# EAGLE board 19260 (EAGLE 7.6.0)
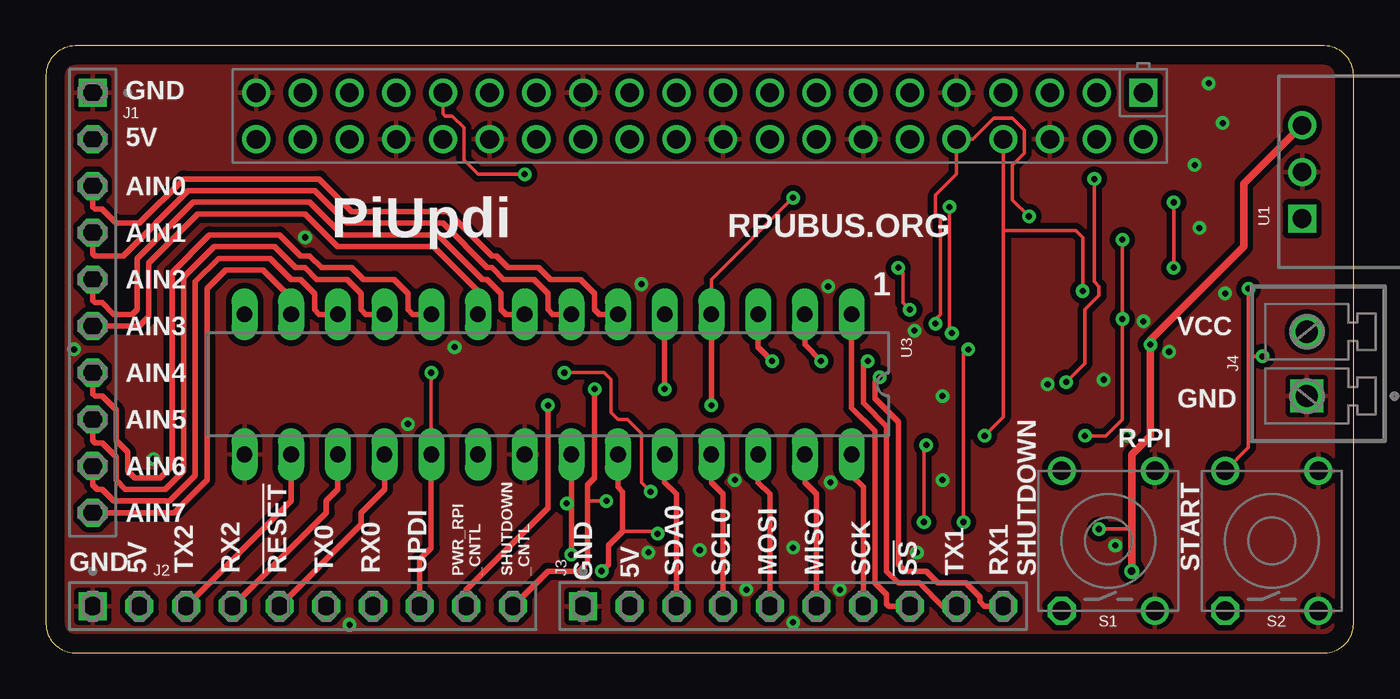
[diagram p0: board, top side]
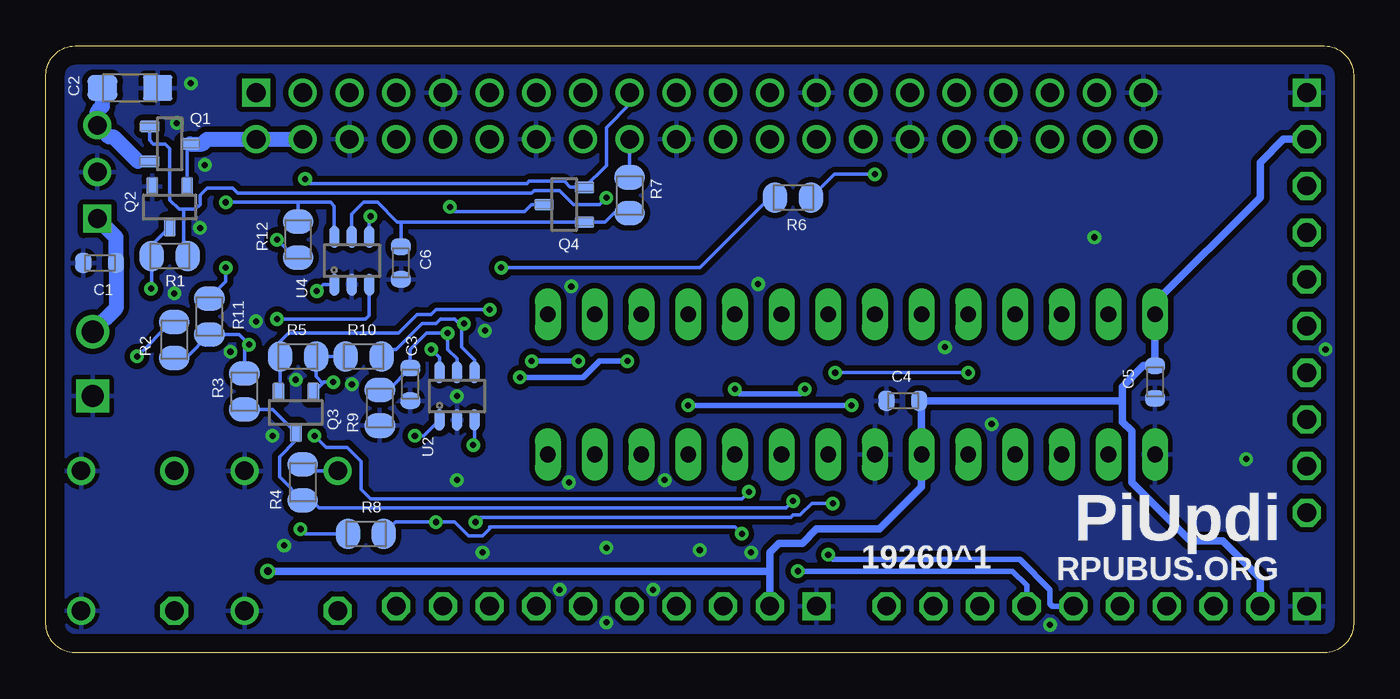
[diagram p1: board, bottom side, seen from below]

Size 71.12 x 33.02 mm. Coordinates in mm from the lower left corner, seen from the top.
Outline: 0,31.43 0,1.59 arc90 1.59,0 69.53,0 arc90 71.12,1.59 71.12,31.43 arc90 69.53,33.02 1.59,33.02 arc90 0,31.43
Copper layers (1*16): Top 0.034290625mm / dielectric 60mil / Bottom 0.034290625mm
Design rules "default *": minimum track width 8mil, minimum drill 13mil, track to track 8mil, track to pad 8mil, pad to pad 7mil, via to via 8mil, smd to smd 7mil, copper to edge 40mil, drill to drill 12mil, minimum pad ring 10mil, minimum via ring 8mil, stop-mask expansion 4mil, vias tented up to drill 17mil, thermal gap 10mil
Net classes: 0 default: width 0.178 mm, drill 0.33 mm

## Footprints (pad centres in the part's own frame; a part is rotated, then mirrored left to right if it is on the bottom)
C0603(1608) = smd 0.898 x 1.1: 1 -0.889,0; 2 0.889,0
3216 = smd 1.6 x 1.4: + -1.5,0; - 1.5,0
F1X10 = drill 1.016 square: 1 0,0 | drill 1.016 octagon: 2 2.54,0; 3 5.08,0; 4 7.62,0; 5 10.16,0; 6 12.7,0; 7 15.24,0; 8 17.78,0; 9 20.32,0; 10 22.86,0
MCV2 = drill 1.2 square: 1 0,0 | drill 1.2: 2 3.5,0
RASPI_ZERO_H40PIN = drill 1.016 square: 1 0,0 | drill 1.016: 2 0,2.54; 3 2.54,0; 4 2.54,2.54; 5 5.08,0; 6 5.08,2.54; 7 7.62,0; 8 7.62,2.54; 9 10.16,0; 10 10.16,2.54; 11 12.7,0; 12 12.7,2.54; 13 15.24,0; 14 15.24,2.54; 15 17.78,0; 16 17.78,2.54; 17 20.32,0; 18 20.32,2.54; 19 22.86,0; 20 22.86,2.54; 21 25.4,0; 22 25.4,2.54; 23 27.94,0; 24 27.94,2.54; 25 30.48,0; 26 30.48,2.54; 27 33.02,0; 28 33.02,2.54; 29 35.56,0; 30 35.56,2.54; 31 38.1,0; 32 38.1,2.54; 33 40.64,0; 34 40.64,2.54; 35 43.18,0; 36 43.18,2.54; 37 45.72,0; 38 45.72,2.54; 39 48.26,0; 40 48.26,2.54
SOT23 = smd 0.65 x 1.06: 1(G) -0.95,-1.1; 2(S) 0.95,-1.1; 3(D) 0,1.1
C0805(2012) = smd 1.321 x 1.651: 1 -0.977,0; 2 0.977,0
0M311 = drill 1.016 octagon: 1 -3.81,2.54 | drill 1.016: 2 3.81,2.54; 3 -3.81,-2.54; 4 3.81,-2.54
OKI-78SR-H = drill 1.016 square: 1 0,0 | drill 1.016: 2 -2.54,0; 3 -5.08,0
SOT23-6,SOT26 = smd 0.55 x 1.2: 1 -0.95,-1.3; 2 0,-1.3; 3 0.95,-1.3; 4 0.95,1.3; 5 0,1.3; 6 -0.95,1.3
DIL28-3 = drill 0.85 pad 1.422 long: 1 -16.51,-3.81; 2 -13.97,-3.81; 3 -11.43,-3.81; 4 -8.89,-3.81; 5 -6.35,-3.81; 6 -3.81,-3.81; 7 -1.27,-3.81; 8 1.27,-3.81; 9 3.81,-3.81; 10 6.35,-3.81; 11 8.89,-3.81; 12 11.43,-3.81; 13 13.97,-3.81; 14 16.51,-3.81; 15 16.51,3.81; 16 13.97,3.81; 17 11.43,3.81; 18 8.89,3.81; 19 6.35,3.81; 20 3.81,3.81; 21 1.27,3.81; 22 -1.27,3.81; 23 -3.81,3.81; 24 -6.35,3.81; 25 -8.89,3.81; 26 -11.43,3.81; 27 -13.97,3.81; 28 -16.51,3.81

## Placement (x,y rotation side)
C1  .1uF  [C0603(1608)]  68.2,21.21 180 bottom
C2  10uF  [3216]  66.55,30.73 0 bottom
C3  .1uF  [C0603(1608)]  51.31,14.61 270 bottom
C4  .1uF  [C0603(1608)]  24.51,13.72 180 bottom
C5  .1uF  [C0603(1608)]  10.79,14.73 270 bottom
C6  .1uF  [C0603(1608)]  51.82,21.21 270 bottom
J1  PPPC101LFBN  [F1X10]  2.54,30.48 270 top
J2  PPPC101LFBN  [F1X10]  2.54,2.54 0 top
J3  PPPC101LFBN  [F1X10]  29.21,2.54 0 top
J4  PST1,0/2-3,5  [MCV2]  68.58,13.97 90 top
J5  40 PIN HDR  [RASPI_ZERO_H40PIN]  59.69,30.48 180 top
Q1  DMB  [SOT23]  64.39,27.69 270 bottom
Q2  K38  [SOT23]  64.39,24.26 180 bottom
Q3  K38  [SOT23]  57.53,13.08 180 bottom
Q4  K84  [SOT23]  42.93,24.38 90 bottom
R1  1k  [C0805(2012)]  64.39,21.59 0 bottom
R2  10k  [C0805(2012)]  64.14,17.02 90 bottom
R3  100k  [C0805(2012)]  60.33,14.22 270 bottom
R4  1k  [C0805(2012)]  57.15,9.27 90 bottom
R5  10k  [C0805(2012)]  57.4,16.13 180 bottom
R6  182  [C0805(2012)]  30.48,24.77 0 bottom
R7  182  [C0805(2012)]  39.37,24.89 270 bottom
R8  3.01k  [C0805(2012)]  53.72,6.48 0 bottom
R9  10k  [C0805(2012)]  52.96,13.34 270 bottom
R10  1.82k  [C0805(2012)]  53.85,16.13 0 bottom
R11  3.01k  [C0805(2012)]  62.23,18.29 90 bottom
R12  3.01k  [C0805(2012)]  57.4,22.48 90 bottom
S1  KSA0M311  [0M311]  57.78,6.1 90 top
S2  KSA0M311  [0M311]  66.67,6.1 90 top
U1  I50115H  [OKI-78SR-H]  68.33,23.62 270 top
U2  Z4  [SOT23-6,SOT26]  48.77,13.97 0 bottom
U3  AVR128DA28-I/SP  [DIL28-3]  27.3,14.61 180 top
U4  Z4  [SOT23-6,SOT26]  54.48,21.34 0 bottom

## Library data of the parts
C1 C3-C6 = C-C
C2 = C-T
J1-J3 = J-HDR2.54mm
J4 = J-HDR3.5mm
J5 = U-Pi
Q1 Q4 = Q-PCH
Q2 Q3 = Q-NCH
R1-R12 = R-C
S1 S2 = S-Tactile
U1 = P-DCDC
U2 U4 = U-7400
U3 = U-AVR

## Nets
0V: C1.2 C2.- C3.2 C4.2 C5.2 C6.2 J1.1 J2.1 J3.1 J4.1 J5.6 J5.9 J5.14 J5.20 J5.25 J5.30 J5.34 J5.39 Q2.2(S) R9.2 S1.3 S1.4 S2.3 S2.4 U1.2 U2.2 U3.15 U3.21 U4.2
5V0@2: J5.2 J5.4 Q1.3(D) Q2.1(G)
!RESET: J2.5 U3.18
!SS: J3.8 U3.1
!UPDI_: C3.1 Q4.3(D) R9.1 U2.5
+3V3: J5.17 Q3.1(G) Q4.2(S) R5.1 R10.1
+5V: C2.+ C4.1 C5.1 J1.2 J2.2 J3.2 Q1.2(S) R2.1 R3.1 R8.1 R11.1 U1.3 U3.14 U3.20
AIN0: J1.3 U3.6
AIN1: J1.4 U3.7
AIN2: J1.5 U3.8
AIN3: J1.6 U3.9
AIN4: J1.7 U3.10
AIN5: J1.8 U3.11
AIN6: J1.9 U3.12
AIN7: J1.10 U3.13
MISO: J3.6 U3.27
MOSI: J3.5 U3.26
N$1: R4.2 S1.2
N$2: J5.18 R7.1
N$3: J5.31 R6.2
N$4: R11.2 R12.2 U4.6
N$6: Q2.3(D) R1.1 R2.2 S2.2
PWR_RPI_CNTL: J2.9 Q1.1(G) R1.2 U3.4
RX0: J2.7 R8.2 U2.6 U3.23
RX1: J3.10 U3.3
RX2: J2.4 U3.17
RX_: J5.10 R10.2 U2.4 U4.4
SCK: J3.7 U3.28
SCL0: J3.4 U3.25
SDA0: J3.3 U3.24
SHUTDOWN: Q3.2(S) R5.2 R6.1
SHUTDOWN_CNTL: J2.10 Q3.3(D) R3.2 R4.1 U3.5
TX0: J2.6 U2.3 U3.22
TX1: J3.9 U3.2
TX2: J2.3 U3.16
TX_: J5.8 U2.1 U4.1
UPDI: J2.8 R12.1 U3.19 U4.3
UPDI_: C6.1 Q4.1(G) R7.2 U4.5
VCC: C1.1 J4.2 U1.1

## Tracks (layer width: path | path; a pad name or v marks a point on that pad's centre or on a via)
0V  (via drill 0.33)
  other vias: 14.1,22.61 5.84,10.54 63.25,30.99 1.52,16.51 22.23,16.64 19.68,12.45 32.38,20.07 32.77,5.46 35.56,5.59 37.47,9.4 38.1,3.43 16.51,1.52 40.64,1.65 40.64,5.71 42.67,9.27 43.18,3.43 47.37,5.46 48.77,9.4 42.55,19.94 47.24,17.53 48.77,13.97 54.48,14.61 57.53,14.86 58.17,5.84 58.8,11.81 59.69,18.03 62.74,23.11 62.48,26.54 64.01,28.83 64.14,19.56 61.09,16.38
  pour Top (isolate 0.305): 71.12,0 0,0 0,33.02 71.12,33.02
  pour Bottom (isolate 0.305): 0,33.02 71.12,33.02 71.12,0 0,0
5V0@2
  Bottom 0.203: Q2.1(G) 63.44,27.54 Q1.3(D)
  Bottom 0.813: Q1.3(D) 62.61,27.69 62.36,27.94 J5.2 J5.4
!RESET
  Top 0.305: J2.5 17.14,6.99 17.14,7.62 18.41,8.89 U3.18
!SS
  Top 0.305: U3.1 43.81,13.34 45.09,12.06 45.09,3.81 45.72,3.17 45.72,2.67 45.85,2.54 J3.8
!UPDI_  (via drill 0.33)
  Top 0.203: v49.15,24.26 49.15,17.53 v49.28,17.4
  Bottom 0.203: 49.66,17.4 50.42,17.4 51.31,16.51 C3.1 52.49,14.31 R9.1 | 49.66,17.4 49.28,17.02 49.28,16.51 48.77,16 U2.5 | Q4.3(D) 44.7,24.38 45.09,24 48.9,24 v49.15,24.26 | v49.28,17.4 49.66,17.4
+3V3  (via drill 0.33)
  Top 0.203: v57.02,25.78 57.02,20.19 57.28,19.94 57.28,19.43 56.52,18.67 56.52,15.75 v55.5,14.73
  Bottom 0.203: J5.17 39.37,29.84 40.64,28.57 40.64,26.52 Q4.2(S) 42.61,25.33 42.93,25.65 44.83,25.65 44.96,25.53 56.77,25.53 v57.02,25.78 | 54.93,16.02 R10.1 R5.1 56.43,15.03 56.07,14.67 | v55.5,14.73 56.01,14.73 56.07,14.67 | Q3.1(G) 56.56,14.18 56.07,14.67
+5V  (via drill 0.33, 0.41)
  Top 0.203: v57.28,6.73 59.05,6.73
  Top 0.406: U1.3 65.15,25.53 65.15,22.1 60.07,17.02 v60.07,16.76 60.07,11.81 59.05,10.79 59.05,6.73 v59.05,4.45
  Bottom 0.203: R3.1 60.33,16.51 v60.07,16.76 | R2.1 63.5,16.04 R11.1 60.62,17.31 v60.07,16.76 | 59.94,16.89 v60.07,16.76 | R8.1 57.02,6.48 v57.28,6.73
  Bottom 0.406: Q1.2(S) 66.11,26.74 | J1.2 3.81,27.94 5.08,26.67 5.08,24.77 10.79,19.05 U3.14 C5.1 11.43,15.62 12.57,14.48 12.57,13.72 | 12.57,13.72 12.57,12.57 12.06,12.06 12.06,9.27 8.89,6.1 7.11,6.1 5.08,4.06 J2.2 | J3.2 31.75,4.57 | 31.75,4.57 31.75,5.46 31.24,5.97 29.97,5.97 29.21,6.73 25.78,6.73 23.5,9.02 U3.20 23.5,13.59 C4.1 12.57,13.72 | v59.05,4.45 31.88,4.45 31.75,4.57
  Bottom 0.813: 66.11,26.74 67.44,28.07 67.69,28.07 U1.3 68.33,29.46 68.05,29.74 C2.+
AIN0
  Top 0.305: J1.3 2.54,24.26 2.67,24.13 3.05,24.13 3.81,23.37 5.08,23.37 7.49,25.78 14.86,25.78 16.64,24 21.84,24 24.26,21.59 24.51,21.59 25.15,20.95 26.8,20.95 27.43,20.32 29.08,20.32 29.84,19.56 29.84,18.67 30.1,18.41 U3.6
AIN1
  Top 0.305: J1.4 2.54,21.72 2.67,21.59 4.19,21.59 7.75,25.15 14.61,25.15 16.38,23.37 21.59,23.37 24,20.95 24.26,20.95 24.89,20.32 26.54,20.32 27.3,19.56 27.3,18.67 27.56,18.41 U3.7
AIN2
  Top 0.305: J1.5 2.54,19.18 2.67,19.05 3.05,19.05 3.68,18.41 4.7,18.41 4.95,18.67 4.95,21.46 8,24.51 14.35,24.51 16.13,22.73 21.34,22.73 23.75,20.32 24,20.32 24.77,19.56 24.77,18.67 25.02,18.41 U3.8
AIN3
  Top 0.305: J1.6 5.08,17.78 5.59,18.29 5.59,21.21 8.26,23.88 14.1,23.88 15.88,22.1 21.08,22.1 23.5,19.68 U3.9
AIN4
  Top 0.305: J1.7 2.54,14.1 2.67,13.97 3.05,13.97 3.81,13.21 3.81,11.56 4.45,10.92 4.45,9.91 4.83,9.53 6.22,9.53 6.86,10.16 6.86,20.7 8.89,22.73 12.7,22.73 13.84,21.59 14.35,21.59 14.99,20.95 16.64,20.95 17.27,20.32 18.92,20.32 19.68,19.56 19.68,18.67 19.94,18.41 U3.10
AIN5
  Top 0.305: J1.8 2.54,11.56 2.67,11.43 3.05,11.43 3.81,10.67 3.81,9.4 4.32,8.89 6.48,8.89 7.49,9.91 7.49,20.45 9.14,22.1 12.45,22.1 13.59,20.95 14.1,20.95 14.73,20.32 16.38,20.32 17.14,19.56 17.14,18.67 17.4,18.41 U3.11
AIN6
  Top 0.305: J1.9 2.54,9.14 2.79,8.89 3.05,8.89 3.68,8.26 6.73,8.26 8.13,9.65 8.13,20.19 9.4,21.46 12.19,21.46 13.34,20.32 13.84,20.32 14.61,19.56 14.61,18.67 14.86,18.41 U3.12
AIN7
  Top 0.305: J1.10 6.99,7.62 8.76,9.4 8.76,19.81 9.78,20.83 11.81,20.83 13.34,19.3 U3.13
MISO
  Top 0.305: U3.27 41.27,9.27 41.91,8.64 J3.6
MOSI
  Top 0.305: U3.26 38.73,9.27 39.37,8.64 J3.5
N$1
  Bottom 0.203: R4.2 56.81,9.91 S1.2
N$2
  Bottom 0.203: J5.18 R7.1
N$3  (via drill 0.33)
  Top 0.203: v26.04,26.04 23.5,26.04 22.73,26.8 22.73,28.57 22.1,29.21 21.72,29.21 21.59,29.34 J5.31
  Bottom 0.203: R6.2 28.23,26.04 v26.04,26.04
N$4  (via drill 0.33)
  Top 0.203: v61.34,24.51 v61.34,20.95
  Bottom 0.203: U4.6 55.43,24.32 55.63,24.51 57.4,24.51 | 57.4,24.51 v61.34,24.51 | v61.34,20.95 61.34,20.19 61.85,19.68 61.85,19.52 R11.2 | R12.2 57.4,24.51
N$6  (via drill 0.33)
  Top 0.203: v65.41,19.81 65.41,16.13 | 65.41,16.13 65.41,11.18 S2.2 | v66.17,16.13 65.41,16.13
  Bottom 0.203: Q2.3(D) 65.37,22.18 R1.1 65.37,19.85 v65.41,19.81 | R2.2 64.3,18 v66.17,16.13
PWR_RPI_CNTL  (via drill 0.33)
  Top 0.203: v40.64,24.77 36.2,20.32 U3.4
  Top 0.305: J2.9 22.86,3.43 27.3,7.87 v27.3,13.46 | v36.2,13.46 U3.4
  Bottom 0.203: Q1.1(G) 65.49,27.9 65.28,27.69 64.64,27.69 64.39,27.43 64.39,24.64 63.88,24.13 63.63,24.13 | 63.63,24.13 63.63,21.8 R1.2 | 63.63,24.13 62.99,24.13 62.74,24.38 62.74,24.89 62.36,25.27 60.96,25.27 60.71,25.02 44.7,25.02 44.58,25.15 43.18,25.15 42.42,24.38 41.02,24.38 v40.64,24.77
  Bottom 0.305: v27.3,13.46 v36.2,13.46
RX0  (via drill 0.33)
  Top 0.203: v33.27,6.48 33.15,6.6 31.37,6.6 | v49.91,7.11 49.91,16.26 v50.16,16.51
  Top 0.305: U3.23 31.11,9.02 31.37,8.76 31.37,6.6 30.61,5.84 30.61,4.83 v30.23,4.45
  Bottom 0.203: v33.27,6.48 33.66,6.86 46.99,6.86 46.99,6.73 47.37,6.35 48.13,6.35 48.9,7.11 v49.91,7.11 52.11,7.11 R8.2 | v50.16,16.51 49.72,16.06 U2.6
  Bottom 0.305: J2.7 17.78,3.68 18.54,4.45 v30.23,4.45
RX1  (via drill 0.33)
  Top 0.305: J3.10 51.05,2.54 50.8,2.79 50.8,3.05 50.04,3.81 48.51,3.81 47.88,4.45 46.74,4.45 46.35,4.83 46.35,12.57 45.09,13.84 45.09,14.73 v45.34,14.99 | v39.5,15.88 38.73,16.64 U3.3
  Bottom 0.305: v45.34,14.99 41.91,14.99 41.02,15.88 v39.5,15.88
RX2
  Top 0.305: J2.4 15.24,7.62 15.24,8.26 15.88,8.89 U3.17
RX_  (via drill 0.33)
  Top 0.203: v53.47,23.75 52.58,24.64 52.58,26.54 53.21,27.18 53.21,28.45 52.58,29.08 51.56,29.08 50.42,27.94 J5.10 49.53,26.04 48.39,24.89 48.39,23.88 48.64,23.62 48.64,18.41 48.39,18.16 v48.39,17.91
  Bottom 0.203: U2.4 47.82,15.94 48.51,16.64 48.51,17.78 v48.39,17.91 48.64,17.91 48.9,18.16 49.66,18.16 49.91,17.91 50.67,17.91 52.07,16.51 52.49,16.51 | 52.49,16.51 R10.2 | U4.4 53.53,23.68 v53.47,23.75 | 52.83,16.85 52.49,16.51
SCK
  Top 0.305: U3.28 43.81,9.65 44.45,9.02 J3.7
SCL0
  Top 0.305: U3.25 36.2,9.27 36.83,8.64 J3.4
SDA0
  Top 0.305: U3.24 33.66,9.27 34.29,8.64 J3.3
SHUTDOWN  (via drill 0.33)
  Top 0.203: v46.99,18.67 46.61,19.05 46.61,20.7 v46.35,20.95
  Bottom 0.203: Q3.2(S) 58.38,14.28 R5.2 58.38,16.93 57.91,17.4 51.94,17.4 50.93,18.41 50.16,18.41 49.91,18.67 v46.99,18.67 | v46.35,20.95 35.56,20.95 31.75,24.77 R6.1
SHUTDOWN_CNTL  (via drill 0.33)
  Top 0.203: v30.48,8.26 29.46,8.26
  Top 0.305: v29.84,14.35 29.84,9.53 29.46,9.14 29.46,8.26 29.46,4.95 28.96,4.45 27.3,4.45 J2.10 | v33.66,14.35 U3.5
  Bottom 0.203: v30.48,8.26 30.86,7.87 56.26,7.87 56.68,8.29 R4.1 58.42,9.56 58.42,10.67 57.53,11.56 Q3.3(D) 58.8,13.25 R3.2
  Bottom 0.305: v29.84,14.35 30.1,14.1 33.4,14.1 v33.66,14.35
TX0  (via drill 0.33)
  Top 0.203: 28.57,8.13 v28.32,8.13 | v47.88,11.3 47.75,11.18 v47.75,7.11
  Top 0.305: v28.57,5.33 28.57,8.13 U3.22
  Bottom 0.203: v28.32,8.13 29.46,8.13 30.1,7.49 30.48,7.49 30.61,7.37 47.5,7.37 v47.75,7.11 | U2.3 47.82,11.5 v47.88,11.3
  Bottom 0.305: J2.6 16.38,2.54 16.51,2.67 16.51,3.43 18.16,5.08 28.32,5.08 v28.57,5.33
TX1  (via drill 0.33)
  Top 0.305: J3.9 48.77,2.54 47.5,3.81 46.35,3.81 45.72,4.45 45.72,12.32 44.45,13.59 44.45,15.62 v44.7,15.88 | v42.16,15.88 41.27,16.76 U3.2
  Bottom 0.305: v44.7,15.88 v42.16,15.88
TX2
  Top 0.305: U3.16 13.34,8.26 J2.3
TX_  (via drill 0.33)
  Top 0.203: J5.8 52.07,22.99 | 52.07,22.99 52.07,12.83 v51.05,11.81 | v56.39,19.68 56.39,22.61 56.01,22.99 52.07,22.99
  Bottom 0.203: v51.05,11.81 50.58,11.81 U2.1 | U4.1 56.04,20.04 v56.39,19.68
UPDI  (via drill 0.33)
  Top 0.203: v58.55,22.48 v58.55,18.16 58.55,12.7 57.66,11.81 v56.52,11.81 | v32.89,8.76 32.38,9.27 32.38,11.94 31.62,12.7 31.11,12.7 30.73,13.08 30.73,14.86 30.35,15.24 v28.19,15.24 | v20.95,15.24 U3.19
  Top 0.305: J2.8 20.32,5.08 20.95,5.71 U3.19
  Bottom 0.203: v56.52,11.81 55.88,11.18 54.74,11.18 53.98,10.41 53.98,8.89 53.47,8.38 33.27,8.38 v32.89,8.76 | v28.19,15.24 v20.95,15.24 | U4.3 53.53,18.35 53.72,18.16 v58.55,18.16 | R12.1 57.57,21.5 v58.55,22.48
UPDI_
  Bottom 0.203: R7.2 40.22,23.91 40.7,23.43 Q4.1(G) 51.82,23.43 | C6.1 51.82,23.43 | U4.5 54.48,23.88 53.85,24.51 53.09,24.51 52.01,23.43 51.82,23.43
VCC
  Bottom 0.813: U1.1 67.31,22.61 C1.1 67.31,18.74 J4.2

## Text on the board
tPlace: GND | 5V | AIN0 | PiUpdi | RPUBUS.ORG | AIN1 | AIN2 | 1 | VCC | AIN3 | AIN4 | GND | AIN5 | R-PI | AIN6 | AIN7 | GND | 5V | TX2 | RX2 | !RESET | TX0 | RX0 | UPDI | PWR_RPI / _CNTL | SHUTDOWN / _CNTL | GND | 5V | SDA0 | SCL0 | MOSI | MISO | SCK | !SS | TX1 | RX1 | SHUTDOWN | START
bPlace: PiUpdi | 19260^1 | RPUBUS.ORG